# Altium PCB cando.PcbDoc
Units mm, origin at the board's own origin, x right, y up, seen from the top; angles counter-clockwise.
Board outline 40 x 16 mm, 2 copper layers (Top Layer, Bottom Layer); 32 components, 25 nets, 126 pads, 38 vias.
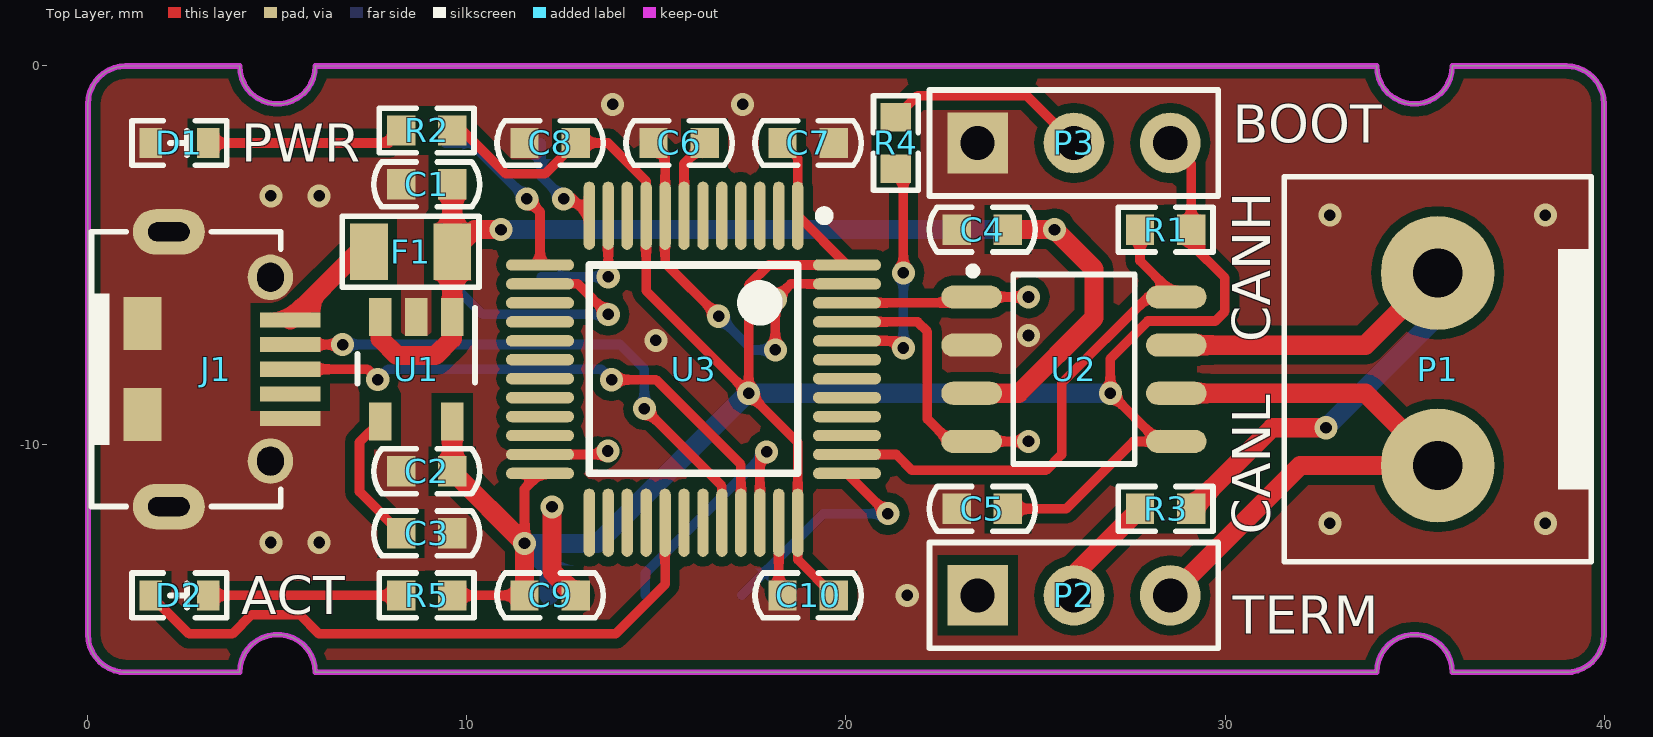
[diagram p0: Top Layer view]
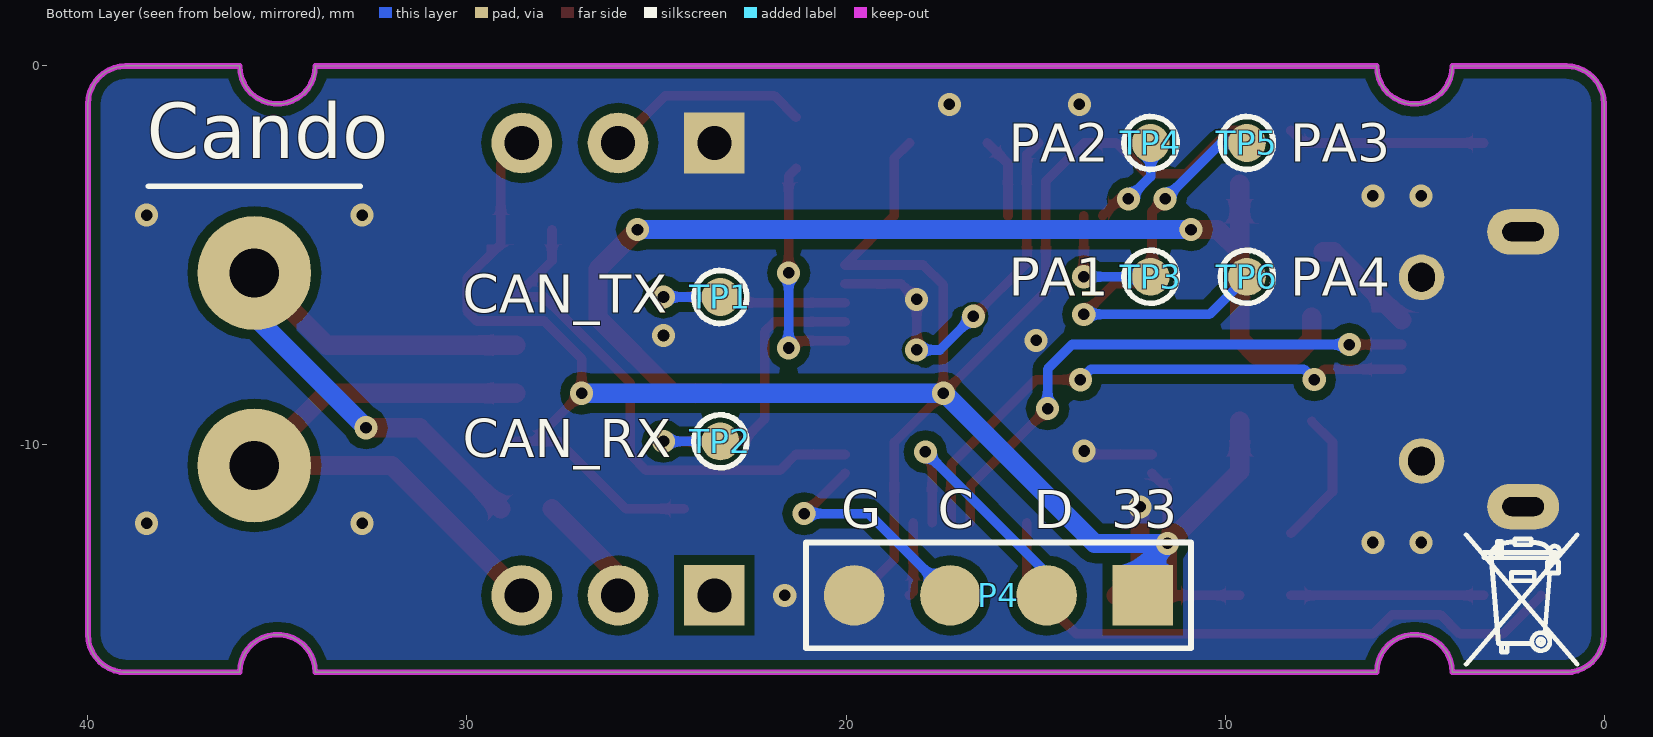
[diagram p1: Bottom Layer view, seen from below]
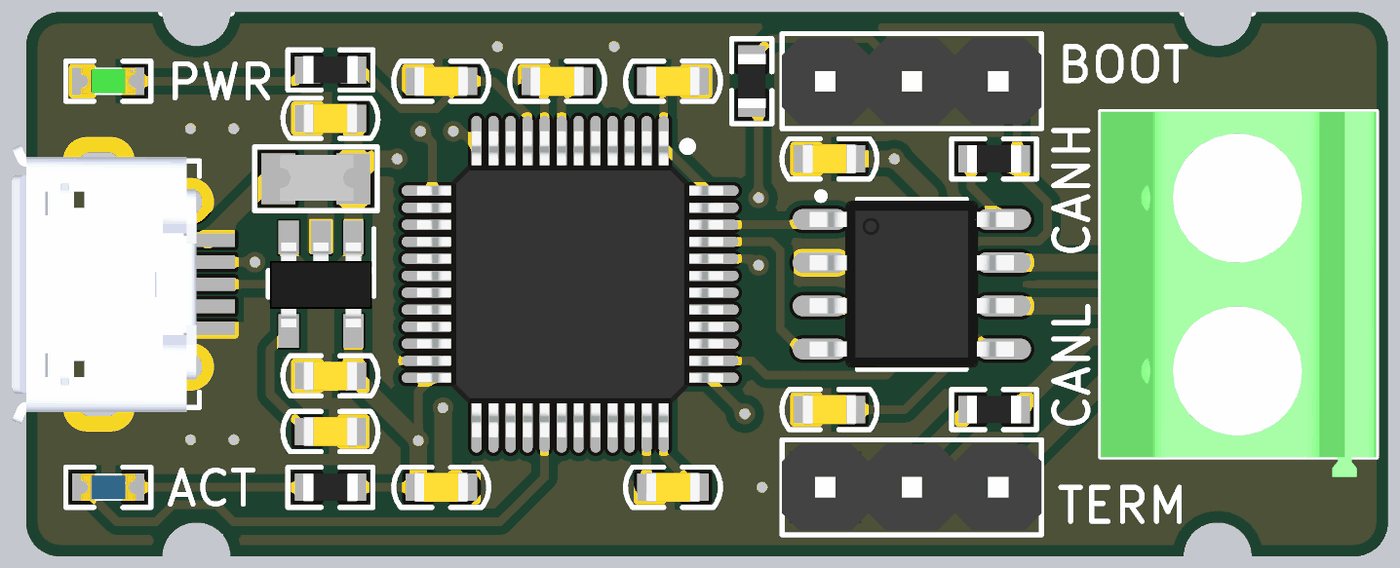
[diagram p2: 3D render of the assembled board from above, using the file's embedded part models]

## Layer stack, top to bottom
Top Solder: solder mask 0.0102, Solder Resist, Dk 3.5
Top Layer: signal copper 0.0356
Dielectric 1: dielectric 0.32, FR-4, Dk 4.8
Bottom Layer: signal copper 0.0356
Bottom Solder: solder mask 0.0102, Solder Resist, Dk 3.5

## Board outline
1,-16 cw(c1,-15) 0,-15 0,-1 cw(c1,-1) 1,0 4,-0.001 4,0 ccw(c5,0) 6,0 6,-0.001 34,0 ccw(c35,0) 36,0 39,0 cw(c39,-1) 40,-1 40,-15 cw(c39,-15) 39,-16 36,-15.999 36,-16 ccw(c35,-16) 34,-16 34,-15.999 6,-15.999 6,-16 ccw(c5,-16) 4,-16 4,-15.999

## Design rules (kind name [scope] priority, off if disabled: settings)
Clearance Clearance_10 [InNamedPolygon('Bottom')] p1: gap=0.254
Clearance Clearance_9 [InNamedPolygon('Bottom')] p2: gap=0.254
Clearance Clearance_8 [InNamedPolygon('GND_L02_P006')] p3: gap=0.254
Clearance Clearance_7 [InNamedPolygon('Top')] p4: gap=0.254
Clearance Clearance_6 [InNamedPolygon('Bootom')] p5: gap=0.254
Clearance Clearance_5 [InNamedPolygon('Bootom')] p6: gap=2.54
Clearance Clearance_4 [InNamedPolygon('Bootom')] p7: gap=0.254
Clearance Clearance_3 [InNamedPolygon('GND_L01_P000')] p8: gap=0.254
Clearance Clearance_2 [InNamedPolygon('Bootom')] p9: gap=0.254
Clearance [InNamedPolygon('Bootom')] p10: gap=0.762
Clearance Clearance_1 [All] p11: gap=0.127
Clearance Polygon [InPolygon] p12: gap=0.254
PolygonConnect PolygonConnect_22 [All vs IsNamedPolygon('Top')] p1: connectstyle=Direct reliefconductorwidth=0.254 reliefentries=4 polygonreliefangle="90 Angle" airgapwidth=0.254
PolygonConnect PolygonConnect_21 [All vs IsNamedPolygon('Bottom')] p2: connectstyle=Direct reliefconductorwidth=0.254 reliefentries=4 polygonreliefangle="90 Angle" airgapwidth=0.254
PolygonConnect PolygonConnect_20 [All vs IsNamedPolygon('Top Layer-No Net')] p3: connectstyle=Direct reliefconductorwidth=0.254 reliefentries=4 polygonreliefangle="90 Angle" airgapwidth=0.254
PolygonConnect PolygonConnect_19 [All vs IsNamedPolygon('GND_L02_P006')] p4: connectstyle=Direct reliefconductorwidth=0.254 reliefentries=4 polygonreliefangle="90 Angle" airgapwidth=0.254
PolygonConnect PolygonConnect_18 [All vs IsNamedPolygon('GND_L02_P006')] p5: connectstyle=Direct reliefconductorwidth=0.254 reliefentries=4 polygonreliefangle="90 Angle" airgapwidth=0.254
PolygonConnect PolygonConnect_17 [All vs IsNamedPolygon('GND_L02_P006')] p6: connectstyle=Direct reliefconductorwidth=0.254 reliefentries=4 polygonreliefangle="90 Angle" airgapwidth=0.254
PolygonConnect PolygonConnect_16 [All vs IsNamedPolygon('GND_L02_P006')] p7: connectstyle=Direct reliefconductorwidth=0.254 reliefentries=4 polygonreliefangle="90 Angle" airgapwidth=0.254
PolygonConnect PolygonConnect_15 [All vs IsNamedPolygon('Bootom')] p8: connectstyle=Direct reliefconductorwidth=0.254 reliefentries=4 polygonreliefangle="90 Angle" airgapwidth=0.254
PolygonConnect PolygonConnect_14 [All vs IsNamedPolygon('Bootom')] p9: connectstyle=Relief reliefconductorwidth=0.254 reliefentries=4 polygonreliefangle="90 Angle" airgapwidth=0.254
PolygonConnect PolygonConnect_13 [All vs IsNamedPolygon('Bootom')] p10: connectstyle=Relief reliefconductorwidth=0.254 reliefentries=4 polygonreliefangle="90 Angle" airgapwidth=2.54
PolygonConnect PolygonConnect_12 [All vs IsNamedPolygon('Bootom')] p11: connectstyle=Direct reliefconductorwidth=0.254 reliefentries=4 polygonreliefangle="90 Angle" airgapwidth=0.254
PolygonConnect PolygonConnect_11 [All vs IsNamedPolygon('NONET_L02_P012')] p12: connectstyle=Direct reliefconductorwidth=0.254 reliefentries=4 polygonreliefangle="90 Angle" airgapwidth=0.254
PolygonConnect PolygonConnect_10 [All vs IsNamedPolygon('NONET_L02_P012')] p13: connectstyle=Direct reliefconductorwidth=0.254 reliefentries=4 polygonreliefangle="90 Angle" airgapwidth=0.254
PolygonConnect PolygonConnect_9 [All vs IsNamedPolygon('Top')] p14: connectstyle=Direct reliefconductorwidth=0.254 reliefentries=4 polygonreliefangle="90 Angle" airgapwidth=0.254
PolygonConnect PolygonConnect_8 [All vs IsNamedPolygon('GND_L02_P006')] p15: connectstyle=Direct reliefconductorwidth=0.254 reliefentries=4 polygonreliefangle="90 Angle" airgapwidth=0.254
PolygonConnect PolygonConnect_7 [All vs IsNamedPolygon('GND_L02_P006')] p16: connectstyle=Direct reliefconductorwidth=0.254 reliefentries=4 polygonreliefangle="90 Angle" airgapwidth=0.254
PolygonConnect PolygonConnect_6 [All vs IsNamedPolygon('GND_L02_P006')] p17: connectstyle=Direct reliefconductorwidth=0.254 reliefentries=4 polygonreliefangle="90 Angle" airgapwidth=0.254
PolygonConnect PolygonConnect_5 [All vs IsNamedPolygon('GND_L02_P004')] p18: connectstyle=Direct reliefconductorwidth=0.254 reliefentries=4 polygonreliefangle="90 Angle" airgapwidth=0.254
PolygonConnect PolygonConnect_4 [All vs IsNamedPolygon('GND_L02_P004')] p19: connectstyle=Direct reliefconductorwidth=0.254 reliefentries=4 polygonreliefangle="90 Angle" airgapwidth=0.254
PolygonConnect PolygonConnect_3 [All vs IsNamedPolygon('GND_L02_P004')] p20: connectstyle=Direct reliefconductorwidth=0.254 reliefentries=4 polygonreliefangle="90 Angle" airgapwidth=0.254
PolygonConnect PolygonConnect_2 [All vs IsNamedPolygon('GND_L02_P004')] p21: connectstyle=Direct reliefconductorwidth=0.254 reliefentries=4 polygonreliefangle="90 Angle" airgapwidth=0.254
PolygonConnect PolygonConnect_1 [All vs IsNamedPolygon('GND_L02_P004')] p22: connectstyle=Direct reliefconductorwidth=0.254 reliefentries=4 polygonreliefangle="90 Angle" airgapwidth=0.254
PolygonConnect [All] p23: connectstyle=Relief reliefconductorwidth=0.254 reliefentries=4 polygonreliefangle="90 Angle" airgapwidth=0.254
RoutingVias [All] p1: holewidth=0.711 width=1.27 viastyle="Through Hole" minholewidth=0.2 minwidth=0.1 maxholewidth=2 maxwidth=10
SolderMaskExpansion [All] p1: expansion=0.102
Width [All] p1: maxlimit=6 minlimit=0.1 preferedwidth=0.254
30 further rules are at their usual default settings.

## Components (designator, comment, footprint, x,y, rotation, side; value= is the part's Value field where it differs from the comment)
C1 "4.7uF" 0603C 8.936,-3.123 r180 top
C2 "4.7uF" 0603C 8.936,-10.692 r180 top
C3 "22nF" 0603C 8.936,-12.331 r0 top
C4 "100nF" 0603C 23.597,-4.317 r180 top
C5 "100nF" 0603C 23.597,-11.683 r180 top
C6 "100nF" 0603C 15.596,-2.031 r180 top
C7 "100nF" 0603C 19,-2.031 r0 top
C8 "100nF" 0603C 12.192,-2.031 r180 top
C9 "100nF" 0603C 12.192,-13.969 r0 top
C10 "100nF" 0603C 19,-13.969 r180 top
D1 "LED_GREEN" LED_0603_GREEN 2.413,-2.031 r180 top
D2 "LED_BLUE" LED_0603_BLUE 2.413,-13.969 r180 top
F1 "Fuse" FUSE_0805 8.511,-4.901 r0 top
J1 "MicroUSB-B" USB-Micro_0 3.434,-8 r0 top
P1 "MKDSN1.5_2-5.08" MKDSN-5.08-3P 35.611,-8 r0 top
P2 "Header_3_2.54" HEADER_3 26.015,-13.969 r90 top
P3 "Header_3_2.54" HEADER_3 26.015,-2.031 r90 top
P4 "PAD_4_2.54" HEADER_4_PAD 15.977,-13.969 r270 bottom
R1 "10K" 0603R 28.433,-4.317 r0 top
R2 "10K" 0603R 8.936,-1.701 r180 top
R3 "120R" 0603R 28.433,-11.683 r180 top
R4 "10K" 0603R 21.316,-2.031 r90 top
R5 "10K" 0603R 8.936,-13.969 r180 top
TP1 "Ø1.5mm,SMD" TP_SMD 23.315,-6.095 r180 bottom
TP2 "Ø1.5mm,SMD" TP_SMD 23.315,-9.905 r90 bottom
TP3 "Ø1.5mm,SMD" TP_SMD 11.963,-5.562 r270 bottom
TP4 "Ø1.5mm,SMD" TP_SMD 11.963,-2.031 r270 bottom
TP5 "Ø1.5mm,SMD" TP_SMD 9.423,-2.031 r270 bottom
TP6 "Ø1.5mm,SMD" TP_SMD 9.423,-5.562 r270 bottom
U1 "RT9193-33GB" SOT23-5 8.661,-8 r270 top
U2 "TJA1051T/3" SOIC8 26.015,-8 r0 top
U3 "STM32F072C8T6" STM-LQFP48_N 15.977,-8 r270 top

## Footprints (in the part's own frame and the unit in brackets; to place one, negate y for a bottom-side part, rotate by r counter-clockwise, add the part's x,y. Pads: shape width x height; smd on the part's side, far side on the other; paste and mask are expansions set on the pad)
0603C [mm]
  rect 0.75x0.8 smd: 1(-0.675,0) 2(0.675,0)
  silkscreen extent -1.4,-0.59 1.4,0.59, body extent -0.8,-0.43 0.8,0.43, height 0.8
0603R [mm]
  rect 0.75x0.8 smd: 1(-0.675,0) 2(0.675,0)
  silkscreen extent -1.25,-0.59 1.25,0.59, body extent -0.8,-0.41 0.8,0.4, height 0.41
FUSE_0805 [mm]
  rect 1x1.5 smd: 1(-1.1,0) 2(1.1,0)
  silkscreen extent -1.8,-0.94 1.8,0.94, body extent -1.05,-0.65 1.1,0.7, height 0.66
HEADER_3 [mm]
  rect 1.6x1.6 hole 0.9: 1(0,2.54)
  round 1.6 hole 0.9: 2(0,0) 3(0,-2.54)
  silkscreen extent -1.4,-3.81 1.4,3.81, body extent -1.27,-3.81 1.27,3.81, height 8
HEADER_4_PAD [mm]
  rect 1.6x1.6 smd: 1(0,3.81)
  round 1.6 smd: 2(0,1.27) 3(0,-1.27) 4(0,-3.81)
  silkscreen extent -1.4,-5.08 1.4,5.08
LED_0603_BLUE [mm]
  rect 0.6x0.8 smd: 1(-0.76,0) 2(0.76,0)
  silkscreen extent -1.25,-0.59 1.25,0.59, body extent -0.8,-0.4 0.8,0.4, height 0.6
LED_0603_GREEN [mm]
  rect 0.6x0.8 smd: 1(-0.76,0) 2(0.76,0)
  silkscreen extent -1.25,-0.59 1.25,0.59, body extent -0.8,-0.4 0.8,0.4, height 0.6
MKDSN-5.08-3P [mm]
  round 3 hole 1.3: 1(0,2.54) 2(0,-2.54)
  silkscreen extent -4.05,-5.08 4.06,5.08, body extent -4.05,-5.66 4.05,5.07, height 10
SOIC8 [mm]
  oval 1.6x0.61 smd: 1(-2.7,1.905) 2(-2.7,0.635) 3(-2.7,-0.635) 4(-2.7,-1.905) 5(2.7,-1.905) 6(2.7,-0.635) 7(2.7,0.635) 8(2.7,1.905)
  silkscreen extent -2.77,-2.5 1.6,2.69, body extent -3,-2.45 3,2.45, height 1.7
SOT23-5 [mm]
  rect 1x0.6 smd paste+0 mask+0.051: 1(-1.375,0.95) 2(-1.375,0) 3(-1.375,-0.95) 4(1.375,-0.95) 5(1.375,0.95)
  silkscreen extent -1.63,-1.55 0.38,1.55, body extent -1.23,-1.5 1.27,1.5, height 1.05
STM-LQFP48_N [mm] "QFP, 48-Leads, Body 7x7mm, Pitch 0.5mm, IPC Medium Density"
  oval 1.8x0.3 smd: 1(-4.05,2.75) 2(-4.05,2.25) 3(-4.05,1.75) 4(-4.05,1.25) 5(-4.05,0.75) 6(-4.05,0.25) 7(-4.05,-0.25) 8(-4.05,-0.75) 9(-4.05,-1.25) 10(-4.05,-1.75) 11(-4.05,-2.25) 12(-4.05,-2.75) 25(4.05,-2.75) 26(4.05,-2.25) 27(4.05,-1.75) 28(4.05,-1.25) 29(4.05,-0.75) 30(4.05,-0.25) 31(4.05,0.25) 32(4.05,0.75) 33(4.05,1.25) 34(4.05,1.75) 35(4.05,2.25) 36(4.05,2.75)
  oval 0.3x1.8 smd: 13(-2.75,-4.05) 14(-2.25,-4.05) 15(-1.75,-4.05) 16(-1.25,-4.05) 17(-0.75,-4.05) 18(-0.25,-4.05) 19(0.25,-4.05) 20(0.75,-4.05) 21(1.25,-4.05) 22(1.75,-4.05) 23(2.25,-4.05) 24(2.75,-4.05) 37(2.75,4.05) 38(2.25,4.05) 39(1.75,4.05) 40(1.25,4.05) 41(0.75,4.05) 42(0.25,4.05) 43(-0.25,4.05) 44(-0.75,4.05) 45(-1.25,4.05) 46(-1.75,4.05) 47(-2.25,4.05) 48(-2.75,4.05)
  silkscreen extent -4.17,-2.75 2.75,3.58, body extent -4.5,-4.5 4.5,4.5, height 1.6
TP_SMD [mm]
  round 1 smd paste-5: 1(0,0)
  silkscreen extent -0.7,-0.7 0.7,0.7
USB-Micro_0 [mm]
  rect 1.6x0.4 smd: 1(1.9,1.3) 2(1.9,0.65) 3(1.9,0) 4(1.9,-0.65) 5(1.9,-1.3)
  rect 1x1.4 smd: 6(-2,-1.2) 6(-2,1.2)
  oval 1.9x1.2 hole 0.5 slot 1.1 at 0 deg: 6(-1.3,-3.625) 6(-1.3,3.625)
  round 1.2 hole 0.7 slot 0.762 at 90 deg: 6(1.38,-2.425) 6(1.38,2.425)
  silkscreen extent -3.37,-3.62 1.66,3.63, body extent -3.86,-4.1 1.57,4.1, height 2.72

## Part data
C1 C2 C3 C4 C5 C6 C7 C8 C9 C10: "Capacitor"
D1 D2: library part LED, "LED"
J1: "MicroUSB-B-SMT"
P1: library part Header_2, "Header_2_2.54"
P2 P3: library part Header_3
P4: library part Header_4, "Header_4_2.54"
R1 R2 R3 R4 R5: "Resistor"
TP1 TP2 TP3 TP4 TP5 TP6: "1.0mm circular SMD testpad"
U1: "Chip, RT9193-33GB, LDO Regulator"
U2: "Chip, TJA1051T/3, CAN chip"
U3: "ARM Cortex-M0 32-bit MCU, 64 KB Flash, 8 KB Internal RAM, 39 I/Os, 48-pin LQFP, -40 to 85 degC, Tray"

## Via types
v1: diameter 0.61, hole 0.305, Top Layer to Bottom Layer, tented both sides, 38 vias

## Nets (pads, with @x,y where several pads share a name; then routed paths per layer and width w, separated by ;. In a path a pad name is that pad's centre, name@x,y a point inside that pad or via, vN(x,y) a via of type N, cw(c..) or ccw(c..) an arc to the next point about the centre after c; other vN are vias at no path point)
BOOT0: R4.1 U3.44 | length 6.4
  Top Layer w0.254: U3.44 21.323,-7.25 v1(21.514,-7.441) ; R4.1 21.514,-2.904 v1(21.514,-5.46)
  Bottom Layer w0.254: v1(21.514,-7.441) v1(21.514,-5.46)
CAN_RX: TP2.1 U2.4 U3.45 | length 8.9
  Top Layer w0.254: U3.45 21.889,-6.75 22.149,-7.009 22.149,-9.317 22.736,-9.905 U2.4 v1(24.816,-9.905)
  Bottom Layer w0.254: TP2.1 v1(24.816,-9.905)
CAN_SILENT: R1.1 U2.8 U3.38 | length 14
  Top Layer w0.254: U3.38 21.325,-10.25 21.742,-10.667 25.273,-10.667 25.69,-10.25 25.69,-8.37 27.965,-6.095 U2.8 27.758,-5.138 R1.1
CAN_TX: TP1.1 U2.1 U3.46 | length 6.4
  Top Layer w0.254: U3.46 23.16,-6.25 U2.1 v1(24.816,-6.095)
  Bottom Layer w0.254: TP1.1 v1(24.816,-6.095)
GND: C1.2 C2.2 C3.2 C4.2 C5.2 C6.2 C7.2 C8.2 C9.2 C10.2 D1.2 J1.5 J1.6 P3.1 P4.4 U1.2 U2.2 U3.8 U3.23 U3.35 U3.47 | length 17
  Top Layer w0.254: U3.23 13.625,-10.25 v1(13.716,-10.159) ; v1(12.243,-11.632) v1@12.243,-11.607 ; C6.2 15.227,-2.337 U3.8 15.227,-5.193 v1(16.637,-6.603) ; v1(18.136,-7.492) v1(18.136,-6.156) 18.542,-5.75 U3.47 ; U3.35 18.227,-13.871 C10.2
  Top Layer w0.508: v1(12.243,-11.632) 12.243,-13.345 C9.2
  Bottom Layer w0.254: v1(16.637,-6.603) 17.526,-7.492 v1(18.136,-7.492)
  other v1: 21.615,-13.969 4.826,-12.572 6.096,-12.572 32.766,-12.064 38.456,-12.064 14.986,-7.238 24.816,-7.111 32.766,-3.936 38.456,-3.936 4.826,-3.428 6.096,-3.428 13.843,-1.015 17.272,-1.015
LED_ACT: D2.2 U3.29 | length 16.6
  Top Layer w0.254: D2.2 2.669,-14.985 3.811,-14.985 4.319,-14.477 5.587,-14.477 6.095,-14.985 13.919,-14.985 15.227,-13.678 U3.29
NetC3_1: C3.1 U1.4 | length 3.6
  Top Layer w0.254: U1.4 7.163,-9.924 7.163,-11.232 C3.1
NetC6_1: C6.1 U3.7 | length 2.1
  Top Layer w0.254: U3.7 15.727,-2.575 C6.1
NetD1_1: D1.1 R2.2 | length 5.2
  Top Layer w0.254: D1.1 7.931,-2.031 R2.2
NetD2_1: D2.1 R5.2 | length 5.1
  Top Layer w0.254: D2.1 R5.2
NetF1_1: F1.1 J1.1 | length 2.8
  Top Layer w0.508: J1.1 7.133,-4.901 F1.1
NetP1_1: P1.1 R3.1 U2.7 | length 17.4
  Top Layer w0.508: U2.7 33.706,-7.365 P1.1 ; R3.1 31.245,-9.546 v1(32.664,-9.546)
  Bottom Layer w0.508: v1(32.664,-9.546) 35.611,-6.6 P1.1
NetP1_2: P1.2 P2.3 U2.6 | length 16.2
  Top Layer w0.508: P2.3 31.984,-10.54 P1.2 33.706,-8.635 U2.6
NetP2_2: P2.2 R3.2 | length 3
  Top Layer w0.508: P2.2 26.015,-13.426 R3.2
NetP3_2: P3.2 R4.2 | length 5.5
  Top Layer w0.254: R4.2 21.889,-0.783 24.766,-0.783 P3.2
NetTP3_1: TP3.1 U3.11 | length 3.4
  Top Layer w0.254: v1(13.727,-5.562) U3.11
  Bottom Layer w0.254: TP3.1 v1(13.727,-5.562)
NetTP4_1: TP4.1 U3.12 | length 2.6
  Top Layer w0.254: v1(12.548,-3.504) 12.781,-3.504 U3.12
  Bottom Layer w0.254: TP4.1 11.963,-2.92 v1(12.548,-3.504)
NetTP5_1: TP5.1 U3.13 | length 4.7
  Top Layer w0.254: v1(11.582,-3.504) 11.927,-3.848 U3.13
  Bottom Layer w0.254: TP5.1 10.109,-2.031 v1(11.582,-3.504)
NetTP6_1: TP6.1 U3.14 | length 6.8
  Top Layer w0.254: U3.14 12.924,-5.75 v1(13.727,-6.552)
  Bottom Layer w0.254: TP6.1 10.414,-6.552 v1(13.727,-6.552)
SWCLK: P4.3 U3.37 | length 6.3
  Top Layer w0.254: U3.37 21.087,-11.81 v1(21.107,-11.81)
  Bottom Layer w0.254: P4.3 19.406,-11.81 v1(21.107,-11.81)
SWDIO: P4.2 U3.34 | length 7.1
  Top Layer w0.254: U3.34 17.727,-10.361 v1(17.907,-10.181)
  Bottom Layer w0.254: P4.2 14.707,-13.381 v1(17.907,-10.181)
USB_DM: J1.2 U3.32 | length 14.5
  Top Layer w0.254: J1.2 v1(6.719,-7.35) ; v1(14.681,-9.041) 16.727,-11.087 U3.32
  Bottom Layer w0.254: v1(6.719,-7.35) 14.031,-7.35 14.681,-8 v1(14.681,-9.041)
USB_DP: J1.3 U3.33 | length 14.7
  Top Layer w0.254: J1.3 7.369,-8 v1(7.645,-8.276) ; v1(13.818,-8.279) 14.979,-8.279 14.983,-8.276 17.227,-10.52 U3.33
  Bottom Layer w0.254: v1(7.645,-8.276) 7.921,-8 13.538,-8 v1(13.818,-8.279)
V3.3: C2.1 C5.1 C7.1 C8.1 C9.1 C10.1 P3.3 P4.1 R1.2 R2.1 R5.1 U1.5 U2.5 U3.1 U3.9 U3.24 U3.36 U3.48 | length 73.4
  Top Layer w0.254: R5.1 C9.1 ; R2.1 9.881,-1.701 11.024,-2.844 12.054,-2.844 C8.1 13.719,-2.031 14.727,-3.038 U3.9 14.727,-5.93 v1(17.431,-8.635) ; v1(11.517,-12.598) 11.517,-11.16 U3.24 ; C7.1 18.727,-2.433 U3.1 U3.48 17.965,-5.25 17.431,-5.783 v1(17.431,-8.635) ; C10.1 18.727,-13.021 U3.36 18.727,-9.93 v1(17.431,-8.635) ; C5.1 25.806,-11.683 27.584,-9.905 U2.5@28.245,-9.905 ; P3.3 29.108,-2.584 R1.2 29.108,-4.697 29.997,-5.587 29.997,-6.476 29.743,-6.73 27.965,-6.73 26.975,-7.721 v1(26.975,-8.635) U2.5@28.245,-9.905 ; U2.5 U2.5@28.245,-9.905
  Top Layer w0.508: U1.5 C2.1 v1(11.517,-12.598) C9.1
  Bottom Layer w0.508: P4.1 12.167,-13.248 v1(11.517,-12.598) 13.436,-12.598 17.399,-8.635 v1(17.431,-8.635) v1(26.975,-8.635)
VCC: C1.1 C4.1 F1.2 U1.1 U1.3 U2.3 | length 31.1
  Top Layer w0.508: U1.3 7.711,-7.199 8.153,-7.641 9.169,-7.641 9.611,-7.199 U1.1 F1.2 ; C1.1 F1.2 ; v1(10.897,-4.317) 10.195,-4.317 F1.2 ; U2.3 24.558,-8.635 26.543,-6.65 26.543,-5.359 v1(25.502,-4.317) C4.1
  Bottom Layer w0.508: v1(10.897,-4.317) v1(25.502,-4.317)
pads on no net: J1.4 P2.1 U3.2 U3.3 U3.4 U3.5 U3.6 U3.10 U3.15 U3.16 U3.17 U3.18 U3.19 U3.20 U3.21 U3.22 U3.25 U3.26 U3.27 U3.28 U3.30 U3.31 U3.39 U3.40 U3.41 U3.42 U3.43

## Polygon pours and split planes (outlines as drawn)
GND on Top Layer "Top" (solid, remove dead copper, pour order 9): 1,-16 cw(c1,-15) 0,-15 0,-1 cw(c1,-1) 1,0 4,-0.001 4,0 ccw(c5,0) 6,0 6,-0.001 34,0 ccw(c35,0) 36,0 39,0 cw(c39,-1) 40,-1 40,-15 cw(c39,-15) 39,-16 36,-15.999 36,-16 ccw(c35,-16) 34,-16 34,-15.999 6,-15.999 6,-16 ccw(c5,-16) 4,-16 4,-15.999
GND on Bottom Layer "Bottom" (solid, remove dead copper, pour order 10): 1,-16 cw(c1,-15) 0,-15 0,-1 cw(c1,-1) 1,0 4,-0.001 4,0 ccw(c5,0) 6,0 6,-0.001 34,0 ccw(c35,0) 36,0 39,0 cw(c39,-1) 40,-1 40,-15 cw(c39,-15) 39,-16 36,-15.999 36,-16 ccw(c35,-16) 34,-16 34,-15.999 6,-15.999 6,-16 ccw(c5,-16) 4,-16 4,-15.999

## Keep-outs
Keep-Out Layer:
  the board outline again, w0.15

## Silkscreen, mask and mechanical layers (free items; w line width, h text height)
Top Overlay:
  text "BOOT" at 30.201,-2.023 h1
  text "PWR" at 4.039,-2.531 h1
  text "CANH" at 31.191,-7.293 h1 r90
  text "CANL" at 31.191,-12.373 h1 r90
  text "ACT" at 4.039,-14.469 h1
  text "TERM" at 30.201,-14.977 h1
Bottom Overlay:
  drawing of 901 lines, arcs and shapes, not listed
  text "PA3" at 8.28,-2.531 h1
  text "PA2" at 15.702,-2.531 h1
  text "Cando" at 38.456,-2.92 h2.5
  text "PA4" at 8.28,-6.062 h1
  text "PA1" at 15.702,-6.062 h1
  text "CAN_TX" at 30.115,-6.512 h1
  text "CAN_RX" at 30.115,-10.322 h1
  text "33" at 13,-12.191 h1
  text "D" at 15.04,-12.191 h1
  text "C" at 17.58,-12.191 h1
  text "G" at 20.12,-12.191 h1

## Dimensions
0,0 to 1,-16 on Top Overlay
4,0 to 6,-0.001 on Top Overlay
4,0 to 0,0 on Top Overlay
34,0 to 36,-0.001 on Top Overlay
40,0 to 36,0 on Top Overlay
40,0 to 0,0 on Top Overlay